# EAGLE board mouseHatbiggerHBridge2 (EAGLE 9.6.2)
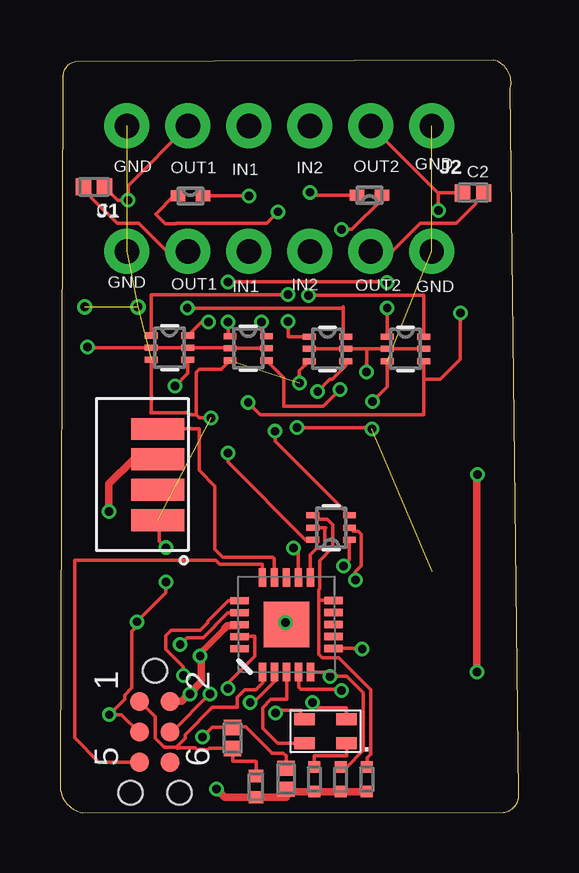
[diagram p0: board, top side]
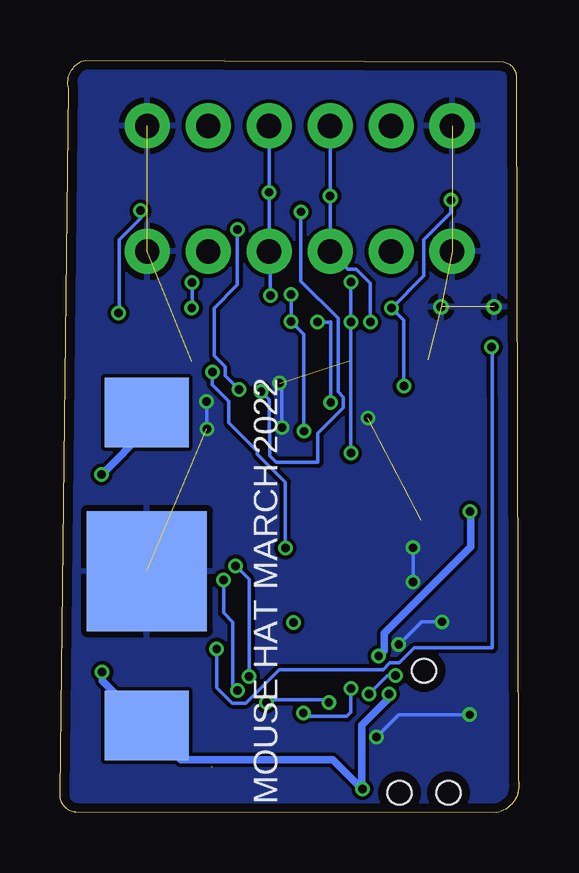
[diagram p1: board, bottom side, seen from below]

Size 19.12 x 31.37 mm. Coordinates in mm from the lower left corner, seen from the top.
Outline: 18.06,31.37 0.65,31.29 arc90 0.12,30.56 0.02,1.36 arc90 0.95,0 18.47,0.03 arc90 19.12,0.81 18.77,30.18 arc90 18.06,31.37
Copper layers (1*16): Top 0.035559375mm / dielectric 1.6mm / Bottom 0.035559375mm
Design rules "oshpark-2layer": minimum track width 6mil, minimum drill 10mil, track to track 6mil, track to pad 6mil, pad to pad 6mil, via to via 6mil, smd to smd 6mil, copper to edge 15mil, drill to drill 6mil, minimum pad ring 5mil, minimum via ring 5mil, stop-mask expansion 2.5mil, vias tented up to drill 0mil, thermal gap 10mil

## Footprints (pad centres in the part's own frame; a part is rotated, then mirrored left to right if it is on the bottom)
CAPC1005X70N = smd 0.64 x 0.72: 1 -0.439,0; 2 0.439,0
1X06_NO_SILK = drill 1.016 pad 1.88: 1 0,0; 2 2.54,0; 3 5.08,0; 4 7.62,0; 5 10.16,0; 6 12.7,0
ES6_TOS = smd 0.533 x 0.254: 1 -0.762,0.508; 2 -0.762,0; 3 -0.762,-0.508; 4 0.762,-0.508; 5 0.762,0; 6 0.762,0.508
RES_ERA2AED101X = smd 0.475 x 0.5: 1 -0.512,0; 2 0.512,0
RESC1005X40N = smd 0.51 x 0.6: 1 -0.445,0; 2 0.445,0
RES_ERA2ARC472X = smd 0.475 x 0.5: 1 -0.512,0; 2 0.512,0
TAG_CONNECT_MCP = smd 0.795 x 0.795: 1 -1.27,-0.635; 2 -1.27,0.635; 3 0,-0.635; 4 0,0.635; 5 1.27,-0.635; 6 1.27,0.635 | hole 0.998: -2.54,0; 2.54,1.016; 2.54,-1.016
TP_15TH = drill 0.381 pad 0.61: P$1 0,0
QFN20 = smd 0.762 x 0.3: 1 1.829,3.54; 2 1.829,3.04; 3 1.829,2.54; 4 1.829,2.04; 5 1.829,1.54; 11 5.766,1.54; 12 5.766,2.04; 13 5.766,2.54; 14 5.766,3.04; 15 5.766,3.54 | smd 0.3 x 0.762: 6 2.81,0.584; 7 3.31,0.584; 8 3.81,0.584; 9 4.31,0.584; 10 4.81,0.584; 16 4.81,4.496; 17 4.31,4.496; 18 3.81,4.496; 19 3.31,4.496; 20 2.81,4.496 | smd 1.905 x 1.905: P$1 3.81,2.54
ES6 = smd 0.533 x 0.254: 1 -0.762,0.508; 2 -0.762,0; 3 -0.762,-0.508; 4 0.762,-0.508; 5 0.762,0; 6 0.762,0.508
TSOP6238 = smd 0.9 x 2.2: 1 -1.84,0.09; 2 -0.57,0.09; 3 0.7,0.09; 4 1.97,0.09
CDBQR = smd 0.61 x 0.457: 1 -0.521,0; 2 0.521,0
10MM_BATT_HOLDER = smd 2.9 x 3.5: 1 -6.6,0; 3 6.44,0 | smd 5 x 5: 2 0,0
LED_RGB_SUN = smd 0.85 x 0.5: 1 0.875,-0.5; 2 -0.875,-0.5; 3 -0.875,0.5; 4 0.875,0.5

## Placement (x,y rotation side)
C1  GRM155C80J106ME11J  [CAPC1005X70N]  1.42,26.09 180 top
C2  GRM155C80J106ME11J  [CAPC1005X70N]  17.22,25.83 0 top
C3  GRM155C80J106ME11J  [CAPC1005X70N]  9.42,1.42 90 top
C4  GRM155C80J106ME11J  [CAPC1005X70N]  7.18,3.12 90 top
J1  [1X06_NO_SILK]  2.79,23.39 0 top
J2  [1X06_NO_SILK]  15.49,28.63 180 top
MOSFET1  SSM6P35AFE,LF  [ES6_TOS]  11.3,11.89 180 top
R2  ERA2AED101X  [RES_ERA2AED101X]  10.59,1.4 270 top
R3  RR0510P-103-D  [RESC1005X40N]  8.17,1.09 270 top
R7  ERA2ARC472X  [RES_ERA2ARC472X]  12.77,1.4 270 top
R8  ERA2ARC472X  [RES_ERA2ARC472X]  11.7,1.4 90 top
TC  MCP_TAG_CONNECT  [TAG_CONNECT_MCP]  3.96,3.38 270 top
TP2  TEST-POINTTP_15TH_THRU  [TP_15TH]  1.04,21.08 0 top
TP4  TEST-POINTTP_15TH_THRU  [TP_15TH]  3.25,21.08 0 top
U1  PIC16LF1708  [QFN20]  11.98,4.04 90.1 top
U2  SSM6N35AFE  [ES6]  11.15,19.33 0 top
U3  IR RECEIVER  [TSOP6238]  4.16,14.03 90 top
U4  SSM6N35AFE  [ES6]  4.57,19.38 0 top
U5  SSM6N35AFE  [ES6]  14.4,19.33 0 top
U6  SSM6N35AFE  [ES6]  7.84,19.35 0 top
U7  CDBQR70-HF  [CDBQR]  5.43,25.7 0 top
U8  CDBQR70-HF  [CDBQR]  12.9,25.73 180 top
U$2  10MM_BATT_HOLDER  [10MM_BATT_HOLDER]  15.5,10.08 270 bottom
U$6  SUN  [LED_RGB_SUN]  11.06,3.4 0 top

## Library data of the parts
C1-C4 = GRM155C80J106ME11J; DESCRIPTION: 10µF ±20% 6.3V Ceramic Capacitor X6S 0402 (1005 Metric); DIGI-KEY_PART_NUMBER: 490-18210-1-ND; MF: Murata Electronics; MP: GRM155C80J106ME11J; PACKAGE: 1005 Murata
J1 J2 = SparkFun-Connectors; PROD_ID: CONN-08437
MOSFET1 = smallTransistorPackage; COPYRIGHT: Copyright (C) 2021 Ultra Librarian. All rights reserved.; DIGI-KEY_PART_NUMBER_1: SSM6P35AFELFTR-ND; DIGI-KEY_PART_NUMBER_2: SSM6P35AFELFCT-ND; DIGI-KEY_PART_NUMBER_3: SSM6P35AFELFDKR-ND; MANUFACTURER_PART_NUMBER: SSM6P35AFE,LF; MFR_NAME: Toshiba Electronic Devices & Storage Co.
R2 = ERA2AED101X; DESCRIPTION: 100 Ohms ±0.5% 0.063W, 1/16W Chip Resistor 0402 (1005 Metric) Automotive AEC-Q200 Thin Film; DIGI-KEY_PART_NUMBER: P100DECT-ND; MF: Panasonic; MP: ERA2AED101X; PACKAGE: 1005-2 Panasonic
R3 = RR0510P-103-D; DESCRIPTION: 10 kOhms ±0.5% 0.063W, 1/16W Chip Resistor 0402 (1005 Metric) Thin Film; DIGI-KEY_PART_NUMBER: RR05P10.0KDCT-ND; MF: Susumu; MP: RR0510P-103-D; PACKAGE: 1005 Panasonic Electronic Components; PURCHASE-URL: https://pricing.snapeda.com/search/part/RR0510P-103-D/?ref=eda
R7 R8 = ERA2ARC472X; DESCRIPTION: 4.7 kOhms ±0.25% 0.063W, 1/16W Chip Resistor 0402 (1005 Metric) Automotive AEC-Q200 Thin Film; DIGI-KEY_PART_NUMBER: P4.7KCQCT-ND; MF: Panasonic; MP: ERA2ARC472X; PACKAGE: 1005-2 Panasonic
TC U1 U3 U$2 U$6 = SophiEaglev9
TP2 TP4 = SparkFun-Connectors
U2 U4-U6 = nMOSSmall; COPYRIGHT: Copyright (C) 2022 Ultra Librarian. All rights reserved.; DIGI-KEY_PART_NUMBER_1: SSM6N35AFELF-ND; MANUFACTURER_PART_NUMBER: SSM6N35AFE; MFR_NAME: Toshiba Electronic Devices & Storage Co.
U7 U8 = SchottkyDiodeFormousehat; COPYRIGHT: Copyright (C) 2022 Ultra Librarian. All rights reserved.; DIGI-KEY_PART_NUMBER_1: 641-1947-1-ND; DIGI-KEY_PART_NUMBER_2: 641-1947-2-ND; DIGI-KEY_PART_NUMBER_3: 641-1947-6-ND; DIGI-KEY_PART_NUMBER_4: CDBQR70-HF-ND; MANUFACTURER_PART_NUMBER: CDBQR70-HF; MFR_NAME: Comchip

## Nets
CON1: MOSFET1.3 U2.1 U4.1
CON2: MOSFET1.6 U5.1 U6.1
GND: C3.2 C4.2 J1.1 J1.6 J2.1 J2.6 TC.3 TP2.P$1 TP4.P$1 U1.17 U2.3 U3.1 U4.3 U5.3 U6.3 U$2.2
ICSPCLK: TC.5 U1.15
ICSPDAT: TC.4 U1.16
IN1: C1.1 J2.5 U2.6 U4.4
IN2: C2.1 J2.2 U5.4 U6.6
IR_IN: U1.14 U3.4
MCLR: C4.1 R3.1 TC.1 U1.1
N$2: C2.2 J1.5
N$3: R2.1 U$6.1
N$4: C1.2 J1.2
N$5: U2.4 U7.1
N$6: U6.4 U8.1
OUT1: J1.3 J2.4 U4.6 U7.2
OUT2: J1.4 J2.3 U5.6 U8.2
RA4: U1.20
RA5: U1.19 U$6.3
RB4: MOSFET1.4 R7.1 U1.10
RB6: U1.8
RC0: U1.13
RC1: U1.12 U2.2 U2.5 U5.2 U5.5
RC2: MOSFET1.5 U1.11
RC3: MOSFET1.2 U1.4
RC4: U1.3 U$6.2
RC5: U1.2 U$6.4
RC6: MOSFET1.1 R8.2 U1.5
RC7: U1.6 U4.2 U4.5 U6.2 U6.5
RX: U1.9
TX: U1.7
VBATT: C3.1 R2.2 R3.2 R7.2 R8.1 TC.2 U1.18 U3.3 U$2.1 U$2.3

## Tracks (layer width: path | path; a pad name or v marks a point on that pad's centre or on a via)
CON1  (via drill 0.35)
  Top 0.152: U4.1 3.8,21.59 v9.49,21.59 | v9.49,20.47 9.52,20.45 9.52,19.84 U2.1 | MOSFET1.3 8.96,15.49 v8.96,15.9
  Bottom 0.152: v9.49,21.59 v9.49,20.47 8.96,19.94 v8.96,15.9
CON2  (via drill 0.35)
  Top 0.152: U6.1 7.01,19.94 v7.01,20.45 | v7.01,22.12 13.6,22.12 v13.62,22.1 | U5.1 v13.63,21.03 | MOSFET1.6 10.23,11.38 7.01,14.6 v7.01,14.99
  Bottom 0.152: v7.01,22.12 v7.01,20.45 v7.01,14.99 | v13.62,22.1 13.62,21.05 v13.63,21.03
GND  (via drill 0.35)  (9 unrouted)
  Top 0.152: C4.2 7.21,3.59 7.74,3.59 8.85,2.48 | C4.2 7.16,3.59 | TC.3 3.32,3.33 2.56,4.09 v2.05,4.09 2.7,4.73 2.7,4.91 2.99,5.2 2.99,7.57 3.18,7.76 3.18,7.96 v3.21,7.96 | 9.42,1.88 C3.2 9.42,2.37 9.31,2.48 8.85,2.48 | U1.17 6.98,8.34 6.46,7.83 6.46,7.79 5.97,7.3 5.3,7.3 v5.01,7.01 | 3.2,12.19 U3.1 4.14,12.12 4.14,11.32 v4.41,11.05 | 8.82,2.48 8.85,2.48 | C4.2 6.35,3.56 v5.94,3.15 | v3.2,7.97 v3.21,7.96 | v3.21,7.96 4.41,9.17 v4.41,9.63 | U6.3 6.73,18.49 5.81,18.49 5.68,18.36 5.68,16.59 | 5.68,16.59 5.36,16.59 5.26,16.68 3.78,16.68 3.8,16.71 U4.3 | 5.68,16.59 5.81,16.46 v6.29,16.46 | v13,16 12.95,16.05 v9.88,16.05 | v9.98,17.91 9.98,18.41 U2.3 | U5.3 13.63,17.75 v13.03,17.14
  Bottom 0.152: U$2.2 14.95,9.52 14.74,9.52 | v5.01,7.01 4.06,7.96 v3.21,7.96 | v4.41,9.63 v4.41,11.05 | v2.05,4.09 5,4.09 v5.94,3.15 | v13.03,17.14 13,17.12 v13,16 | v9.88,16.05 9.88,17.81 v9.98,17.91
  pour Bottom: 0.07,31.34 29.18,31.34 29.18,-0.03 0.07,-0.03
ICSPCLK
  Top 0.152: TC.5 1.62,2.11 0.61,3.13 0.61,10.52 6.49,10.52 6.66,10.36 8.43,10.36 8.43,10.35 U1.15
ICSPDAT  (via drill 0.35)
  Top 0.152: TC.4 4.67,3.38 v6.24,4.95 | U1.16 7.01,8.84 6.16,7.99 6.16,7.91 5.85,7.6 4.63,7.6 4.4,7.38 4.4,6.83 5.14,6.09 v5.14,5.72
  Bottom 0.152: v6.24,4.95 5.48,5.72 v5.14,5.72
IN1  (via drill 0.35)
  Top 0.152: 1.86,25.98 C1.1 2.42,25.53 v2.84,25.53 2.84,26.14 J2.5 | U4.4 5.33,18.31 v4.8,17.78 | v5.3,21.03 11.76,21.03 11.81,21.08 11.81,19.94 U2.6
  Bottom 0.152: v4.8,17.78 4.8,20.52 v5.3,21.03 3.96,22.38 3.96,23.88 2.84,24.99 v2.84,25.53
IN2  (via drill 0.35)
  Top 0.152: v7.84,17.09 8.35,16.59 15.16,16.59 15.16,18.06 | U5.4 15.16,18.06 | J2.2 15.74,25.83 | 15.74,25.83 C2.1 | 15.74,25.83 15.77,25.81 v15.77,25.09 | 15.16,18.06 15.84,18.06 16.68,18.9 v16.68,20.83 | U6.6 8.4,20.07 v8.4,20.45
  Bottom 0.152: v7.84,17.09 7.84,20.47 7.87,20.45 v8.4,20.45 | v15.77,25.09 15.77,24.77 16.66,23.88 16.66,20.85 v16.68,20.83
IR_IN
  Top 0.152: U1.14 8.93,10.59 8.86,10.66 6.78,10.66 6.45,10.99 6.45,13.62 5.8,14.27 5.8,15.99 4.07,15.99 U3.4
MCLR
  Top 0.152: TC.1 3.97,4 3.97,3.12 4.33,2.75 | 4.34,2.74 4.33,2.75 | 4.34,2.74 4.35,2.75 4.33,2.75 | U1.1 8.44,5.42 8.15,5.14 7.71,5.14 7.39,4.83 7.39,4.39 6.35,4.39 5.22,3.26 5.22,3.12 4.9,2.8 4.9,2.72 | R3.1 8.17,2.13 8.15,2.16 7.21,2.16 7.21,2.66 C4.1 6.22,2.69 6.16,2.62 5.72,2.62 5.63,2.72 4.9,2.72 | 4.9,2.72 4.9,2.69 4.89,2.69 4.85,2.73 4.35,2.73 4.34,2.74
N$1  (via drill 0.35)
  other vias: 9.39,7.92
N$2
  Top 0.152: C2.2 17.33,25.5 17.33,25.38 16.51,24.56 15,24.56 13.84,23.39 J1.5
N$3
  Top 0.152: R2.1 10.59,2.37 11.96,2.37 11.96,2.88 U$6.1
N$4
  Top 0.152: C1.2 1.31,25.76 1.31,25.63 2.38,24.56 3.27,24.56 4.44,23.39 J1.2
N$5  (via drill 0.35)
  Top 0.152: U7.1 4.74,25.7 3.98,24.94 4.39,24.54 4.82,24.54 4.84,24.56 8.61,24.56 v9.09,25.04 | v10.74,17.55 11.25,18.06 11.33,18.06 11.91,18.63 U2.4
  Bottom 0.152: v9.09,25.04 9.09,22.15 7.54,20.6 7.54,17.54 7.31,17.31 7.31,16.87 8.38,15.81 8.38,14.6 10.1,14.6 10.38,14.88 10.38,15.81 10.41,15.83 10.41,17.22 v10.74,17.55
N$6  (via drill 0.35)
  Top 0.152: v11.73,24.31 12.16,24.31 13.42,25.56 U8.1 | U6.4 9.32,18.14 9.32,16.94 10.97,16.94 v11.67,17.65
  Bottom 0.152: v11.73,24.31 11.73,22 12.69,21.03 12.69,19.04 12.24,18.58 12.24,18.21 v11.67,17.65
OUT1  (via drill 0.35)
  Top 0.152: U4.6 5.89,20.45 v6.19,20.45 | U7.2 v7.87,25.7
  Bottom 0.152: v6.19,20.45 6.19,22.06 6.79,22.65 7.13,22.65 J1.3 v7.87,25.7 J2.4
OUT2  (via drill 0.35)
  Top 0.152: v10.36,21.56 15.16,21.56 U5.6 | U8.2 10.54,25.73 v10.41,25.86
  Bottom 0.152: v10.36,21.56 10.36,23.34 J1.4 v10.41,25.86 J2.3
RA5  (via drill 0.35)
  Top 0.152: U$6.3 10.03,4.05 10.03,4.27 9.09,4.27 v8.99,4.17 | U1.19 8.12,7.35 8.12,6.52 7,5.4 v7,5.18
  Bottom 0.152: v8.99,4.17 8.83,4.02 7.17,4.02 7,4.18 v7,5.18
RB4  (1 unrouted)
  Top 0.152: 10.78,8.86 10.78,6.61 10.92,6.47 11.61,6.47 12.95,5.13 12.95,2.44 12.8,2.29 12.8,1.93 | 10.78,8.86 10.79,8.85 U1.10 | MOSFET1.4 10.69,12.24 11.14,12.24 11.37,12.01 11.37,11.07 10.81,10.51 10.81,9.33 10.78,9.3 10.78,8.86
RC0
  Top 0.152: U1.13
RC1  (via drill 0.35)
  Top 0.152: U1.12 9.93,10.83 v9.74,11.03 | U2.2 U2.5 12.77,19.33 | 12.77,19.33 U5.2 U5.5 | v12.77,18.36 12.77,19.33
  Bottom 0.152: v9.74,11.03 9.74,13.78 10.9,14.95 10.9,15.07 12.09,16.26 12.09,17.14 12.77,17.83 v12.77,18.36
RC2
  Top 0.152: U1.11 10.43,10.76 10.69,11.02 10.9,11.02 11.03,11.16 11.03,11.85 11.07,11.89 MOSFET1.5
RC3  (via drill 0.35)
  Top 0.152: U1.4 9.94,5.24 10.03,5.16 11.67,5.16 v11.73,5.1 | MOSFET1.2 12.21,11.73 12.42,11.73 12.56,11.6 12.56,10.29 12.31,10.04 v12.31,9.7
  Bottom 0.152: v11.73,5.1 11.72,5.11 11.93,5.32 11.93,7.95 12.31,8.33 v12.31,9.7
RC4
  Top 0.152: U$6.2 9.07,2.9 8.46,3.52 8.46,4.39 8.79,4.72 9.44,4.72 U1.3
RC5  (via drill 0.35)
  Top 0.152: U$6.4 11.94,4.38 10.72,4.38 10.67,4.43 10.67,4.45 v10.52,4.61 | U1.2 8.95,5.49 8.06,4.61 v7.93,4.61
  Bottom 0.152: v10.52,4.61 10.52,4.71 8.03,4.71 v7.93,4.61
RC6  (via drill 0.35)
  Top 0.152: U1.5 10.49,5.87 | 10.49,5.87 | 10.49,5.87 11.07,5.87 v11.25,5.69 11.96,5.69 12.64,5.01 12.64,2.61 11.94,1.91 R8.2 | v11.81,10.29 12.06,10.54 MOSFET1.1
  Bottom 0.152: v11.81,10.29 11.25,9.73 v11.25,5.69
RC7  (via drill 0.35)
  Top 0.152: U1.6 12.58,6.85 v12.59,6.83 | U4.2 3.78,19.35 | U4.2 U4.5 7.06,19.38 U6.2 U6.5 | U4.2 1.16,19.38 v1.14,19.41
  Bottom 0.152: v12.59,6.83 12.59,5.21 11.95,4.57 11.38,4.57 9.98,5.97 5.66,5.97 5.38,6.25 4.98,6.25 4.35,6.87 1.11,6.87 1.11,17.37 | 1.12,17.38 1.11,17.37 | 1.11,17.37 1.11,19.38 v1.14,19.41
VBATT  (via drill 0.35)
  Top 0.152: 5.89,6.53 v5.84,6.53
  Top 0.254: 6.86,7.69 6.86,7.66 5.89,6.68 5.89,6.53
  Top 0.305: R7.2 R8.1 R2.2 9.52,0.88 C3.1 9.42,0.65 R3.2 6.87,0.65 v6.52,0.99 | TC.2 5.08,4.65 5.39,4.96 v5.42,4.96 5.42,4.99 5.89,5.45 5.89,6.53 | v2.04,12.55 2.04,13.7 3.07,14.73 U3.3 | v17.37,5.87 17.37,14.07 v17.39,14.1 | U1.18 7.44,7.8 6.97,7.8 6.86,7.69
  Bottom 0.305: v5.42,4.96 5.42,4.78 6.55,3.66 6.55,1.02 v6.52,0.99 7.75,2.22 14.09,2.22 U$2.3 17.37,5.5 v17.37,5.87 | v5.84,6.53 5.62,6.76 5.62,7.49 2.01,11.09 2.01,12.52 v2.04,12.55 | v17.39,14.1 15.5,15.99 U$2.1

## Text on the board
tNames: GND | OUT1 | IN1 | IN2 | OUT2 | GND | GND | OUT1 | IN1 | IN2 | OUT2 | GND
bNames: MOUSE HAT MARCH 2022
tValues: No Caps